# EAGLE board USB-C PURE v1 (EAGLE 9.7.0), part 1 of 2
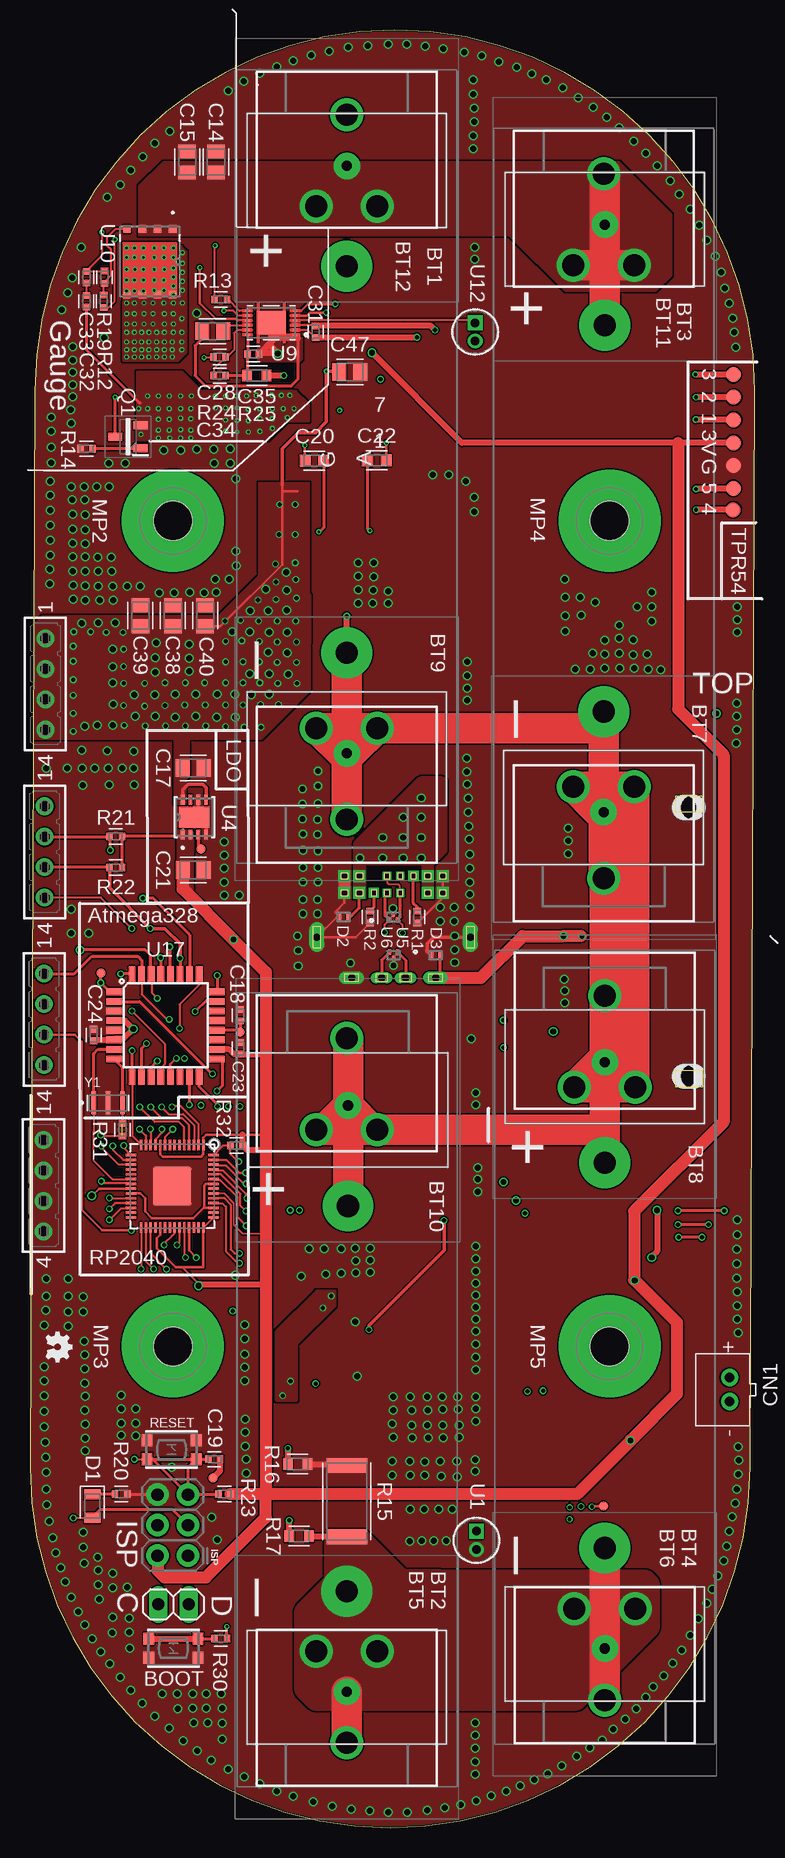
[diagram p0: board, top side]
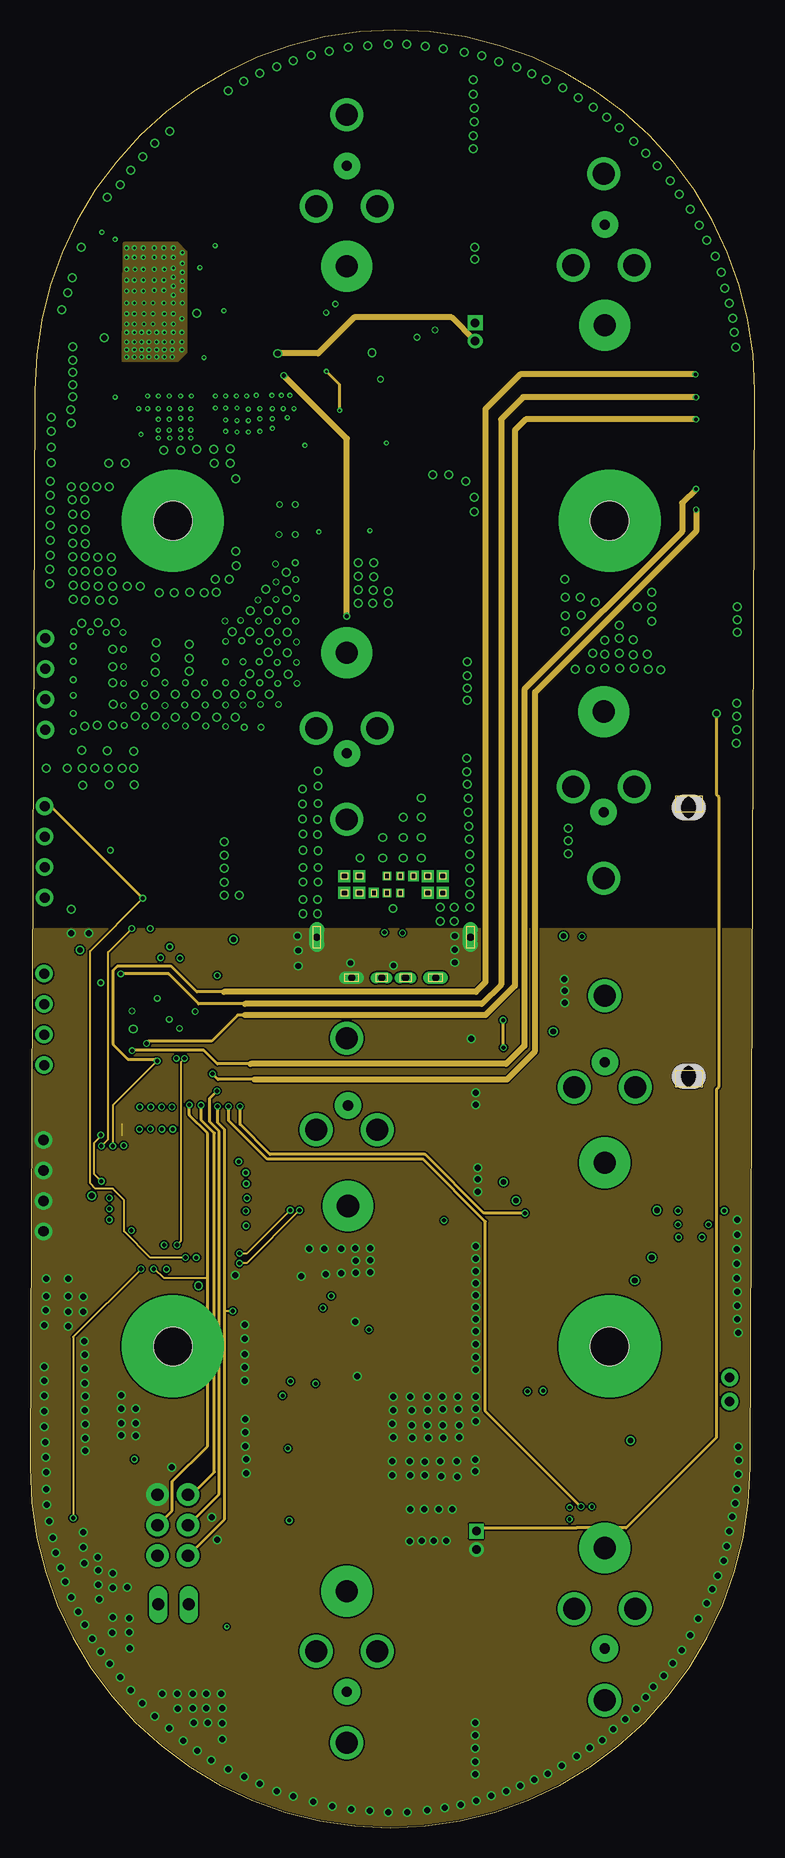
[diagram p1: board, inner layer Route2]
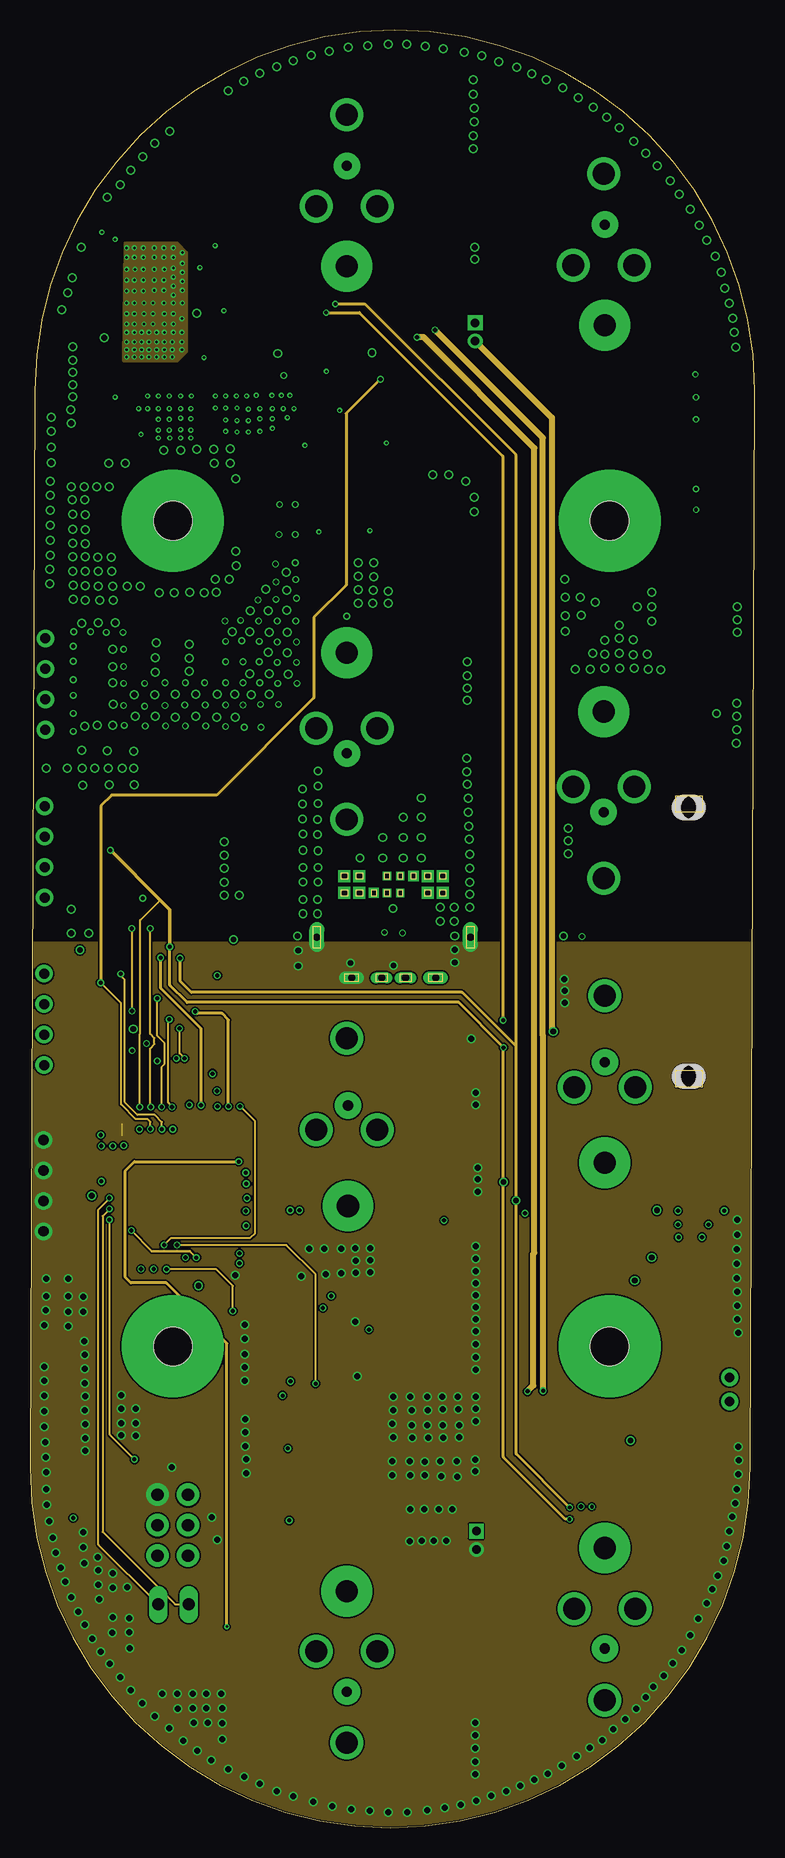
[diagram p2: board, inner layer Route15]
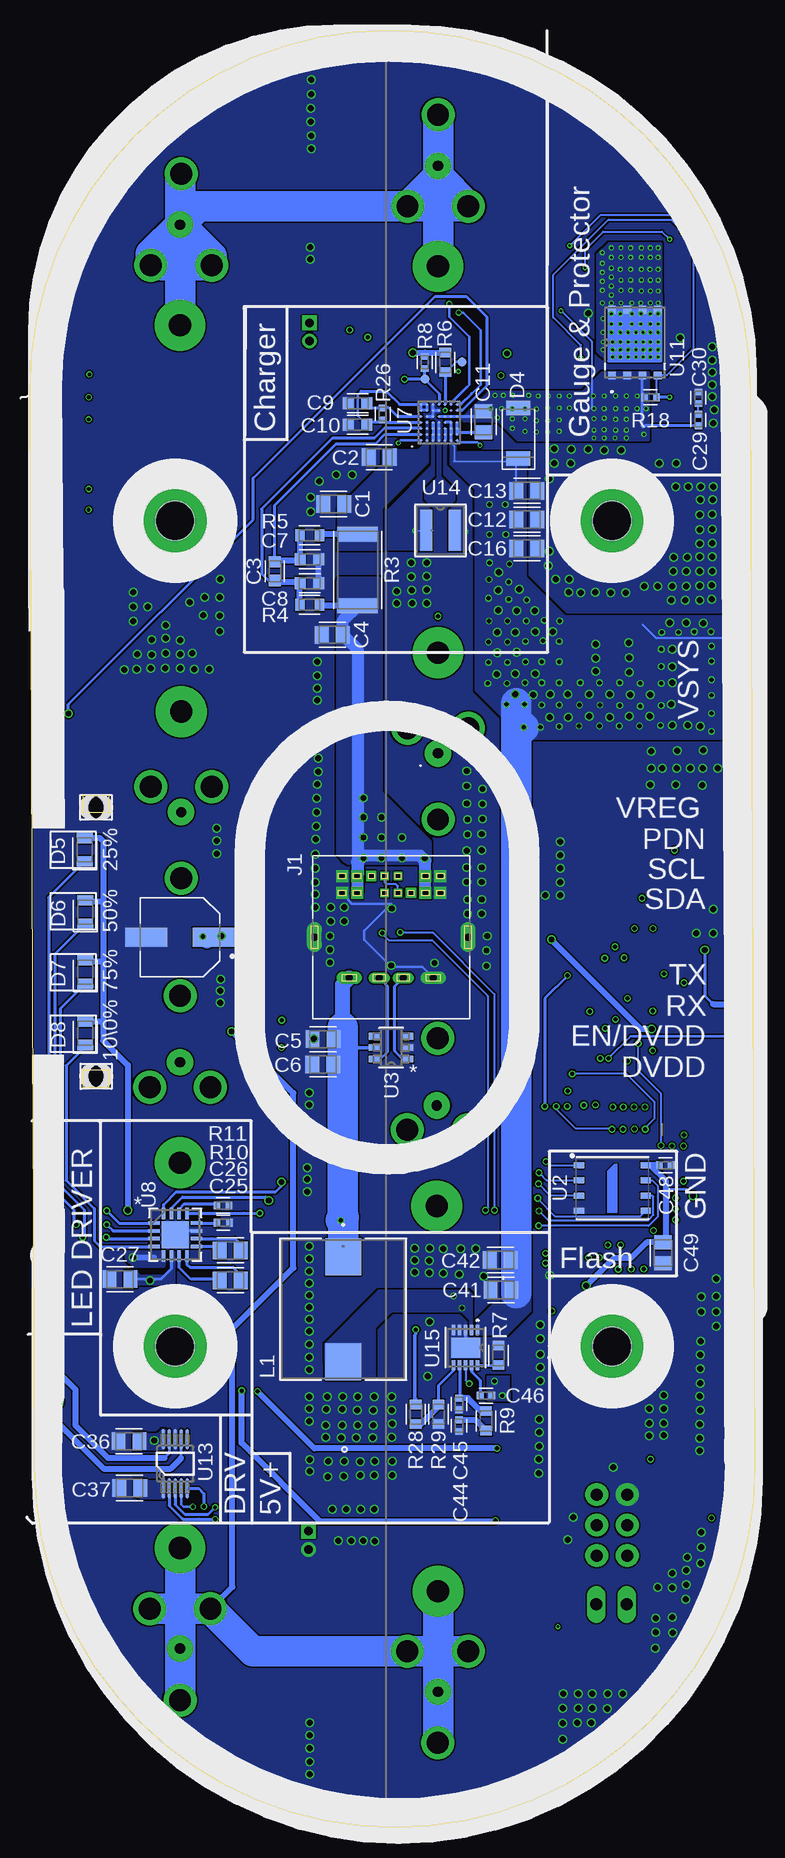
[diagram p3: board, bottom side, seen from below]

Size 60.4 x 149.8 mm. Coordinates in mm from the lower left corner, seen from the top.
Outline: 53.8,84.6 53.8,86 56,86 56,84.6 53.8,84.6
Outline: 53.8,61.7 53.8,63.1 56,63.1 56,61.7 53.8,61.7
Outline: 0.4,119.8 0,30 arc180 60,30 60.4,119.8 arc180 0.4,119.8
Copper layers (1*2*15*16): Top 0.035559375mm / dielectric 0.17018125mm / Route2 0.01778125mm / dielectric 47mil / Route15 0.01778125mm / dielectric 0.17018125mm / Bottom 0.035559375mm
Design rules "jlcpcb-4-layer": minimum track width 5mil, minimum drill 0.2mm, track to track 0.126490625mm, track to pad 0.126490625mm, pad to pad 0.126490625mm, via to via 0.126490625mm, smd to smd 0mil, copper to edge 0.1mm, drill to drill 5mil, minimum pad ring 4mil, minimum via ring 4mil, stop-mask expansion 3mil, vias tented up to drill 100mil, thermal gap 10mil
Net classes: 1 power: width 0.305 mm; 2 gnd: width 0.127 mm, drill 0.483 mm, clearance 0.127 mm; 3 usbvcc: width 0.127 mm, drill 0.483 mm, clearance 0.127 mm; 4 aref: width 0.127 mm, drill 0.483 mm, clearance 0.127 mm

## Footprints (pad centres in the part's own frame; a part is rotated, then mirrored left to right if it is on the bottom)
54 = drill 1.83 pad 2.75: 1 3.3,2.54; 2 3.3,-2.54; 3 -4.32,0; 4 46.77,-2.54; 5 46.77,2.54; 6 54.39,0
254TR = drill 1.85 pad 4.24: 1 0,0 | drill 0.85 pad 2.2: 2 8.38,0
CAPC2012X110 = smd 1.165 x 1.465: 1 -0.875,0; 2 0.875,0
CAPC1608X85 = smd 0.921 x 0.97: 1 -0.775,0; 2 0.775,0
CAPC1005X60 = smd 0.56 x 0.629: 1 -0.485,0; 2 0.485,0
CAP_16SVPG270M = smd 3.5 x 1.6: 1 -2.8,0; 2 2.8,0
JST-PH-2-THM = drill 0.8 pad 1.422: 1 1,0; 2 -1,0
LEDC2012X105N_RND-R = smd 0.862 x 1.362: A 0.975,0; C -0.975,0
DPY2_TEX = smd 0.3 x 0.55: 1 -0.35,0; 2 0.35,0
SODFL4725X110 = smd 1.19 x 2.015: 1 -2.11,0; 2 2.11,0
QFN56_7MM_REDUCEDEPAD = smd 0.875 x 0.2: 1 -3.45,2.6; 2 -3.45,2.2; 3 -3.45,1.8; 4 -3.45,1.4; 5 -3.45,1; 6 -3.45,0.6; 7 -3.45,0.2; 8 -3.45,-0.2; 9 -3.45,-0.6; 10 -3.45,-1; 11 -3.45,-1.4; 12 -3.45,-1.8; 13 -3.45,-2.2; 14 -3.45,-2.6; 29 3.45,-2.6; 30 3.45,-2.2; 31 3.45,-1.8; 32 3.45,-1.4; 33 3.45,-1; 34 3.45,-0.6; 35 3.45,-0.2; 36 3.45,0.2; 37 3.45,0.6; 38 3.45,1; 39 3.45,1.4; 40 3.45,1.8; 41 3.45,2.2; 42 3.45,2.6 | smd 0.2 x 0.875: 15 -2.6,-3.45; 16 -2.2,-3.45; 17 -1.8,-3.45; 18 -1.4,-3.45; 19 -1,-3.45; 20 -0.6,-3.45; 21 -0.2,-3.45; 22 0.2,-3.45; 23 0.6,-3.45; 24 1,-3.45; 25 1.4,-3.45; 26 1.8,-3.45; 27 2.2,-3.45; 28 2.6,-3.45; 43 2.6,3.45; 44 2.2,3.45; 45 1.8,3.45; 46 1.4,3.45; 47 1,3.45; 48 0.6,3.45; 49 0.2,3.45; 50 -0.2,3.45; 51 -0.6,3.45; 52 -1,3.45; 53 -1.4,3.45; 54 -1.8,3.45; 55 -2.2,3.45; 56 -2.6,3.45 | smd 3.2 x 3.2: P$1 0,0
2X3-NS = drill 1.016 pad 1.88: 1 -2.54,-1.27; 2 -2.54,1.27; 3 0,-1.27; 4 0,1.27; 5 2.54,-1.27; 6 2.54,1.27
ADAMTECH_USB-C31-A-D-VT-CS1 = drill 0.45 pad 0.85 square: CC1 -1.65,5.1; CC2 1.65,3.7 | drill 0.6 pad 0.8 long: D+ 1,-3.38; D- -1,-3.38 | drill 0.45 pad 0.7 square: D+_A -0.55,5.1; D+_B 0.55,3.7; D-_A 0.55,5.1; D-_B -0.55,3.7 | drill 0.6 pad 1.05 long: G 3.5,-3.38; V -3.5,-3.38 | drill 0.45 pad 1 square: G_A1 -4.1,5.1; G_A2 4.1,5.1; G_B1 4.1,3.7; G_B2 -4.1,3.7; V_A1 -2.85,5.1; V_A2 2.85,5.1; V_B1 2.85,3.7; V_B2 -2.85,3.7 | drill 0.6 pad 1.25 long: S1 -6.4,0; S2 6.4,0
SAMTEC-SLW-104-01-X-S = drill 0.86 pad 1.46: 1 -3.81,0; 2 -1.27,0; 3 1.27,0; 4 3.81,0
1X02 = drill 1.016 long: 1 -1.27,0; 2 1.27,0
IND_IHLP_4040_DZ_VIS = smd 3.073 x 3.023: 1 -4.369,0; 2 4.369,0
STANDOFF_HEX_MALE-FEMALE_550X1200_M3X0.5_MTGP850H320 = drill 3.2 pad 8.5: 1 0,0 | hole 3.2: 0,0
SOT96P240X120-3N = smd 1.2 x 0.65: 1 -1.05,0.96; 2 -1.05,-0.96; 3 1.05,0
RESC1005X40 = smd 0.535 x 0.644: 1 -0.507,0; 2 0.507,0
RESC6332X71 = smd 1.231 x 3.37: 1 -2.97,0; 2 2.97,0
RESC1608X60 = smd 0.799 x 0.974: 1 -0.815,0; 2 0.815,0
BTN_KMR2_4.6X2.8 = smd 0.9 x 1: A 2.05,0.8; A' -2.05,0.8; B 2.05,-0.8; B' -2.05,-0.8
PAD.03X.03 = smd 0.762 x 0.762: P$1 0,0
PAD.03X.05 = smd 1.27 x 1.27: P$1 0,0
AC_USS = drill 0.711 pad 1.219 square: 1 0,0 | drill 0.711 pad 1.219: 2 1.524,0
WSON-8-6X5-SKINNY_CENTERPAD = smd 0.85 x 0.5: 1 -2.775,1.905; 2 -2.775,0.635; 3 -2.775,-0.635; 4 -2.775,-1.905; 5 2.775,-1.905; 6 2.775,-0.635; 7 2.775,0.635; 8 2.775,1.905
DBV6_TEX = smd 0.978 x 0.559: 1 -1.365,0.95; 2 -1.365,0; 3 -1.365,-0.95; 4 1.365,-0.95; 5 1.365,0; 6 1.365,0.95
VSON_DRBRQ1_TEX = smd 0.813 x 0.305: 1 -1.448,0.975; 2 -1.448,0.325; 3 -1.448,-0.325; 4 -1.448,-0.975; 5 1.448,-0.975; 6 1.448,-0.325; 7 1.448,0.325; 8 1.448,0.975 | smd 1.753 x 2.489: 9 0,0
DMX3_TEX = smd 0.25 x 0.453: 1 0,0.252; 2 -0.34,-0.252; 3 0.34,-0.252
21-100355_MXM = smd 0.25 x 0.25: A1 -1.5,1.5; A2 -1,1.5; A3 -0.5,1.5; A4 0,1.5; A5 0.5,1.5; A6 1,1.5; A7 1.5,1.5; B1 -1.5,1; B2 -1,1; B3 -0.5,1; B4 0,1; B5 0.5,1; B6 1,1; B7 1.5,1; C1 -1.5,0.5; C2 -1,0.5; C3 -0.5,0.5; C4 0,0.5; C5 0.5,0.5; C6 1,0.5; C7 1.5,0.5; D1 -1.5,0; D2 -1,0; D3 -0.5,0; D4 0,0; D5 0.5,0; D6 1,0; D7 1.5,0; E1 -1.5,-0.5; E2 -1,-0.5; E3 -0.5,-0.5; E4 0,-0.5; E5 0.5,-0.5; E6 1,-0.5; E7 1.5,-0.5; F1 -1.5,-1; F2 -1,-1; F3 -0.5,-1; F4 0,-1; F5 0.5,-1; F6 1,-1; F7 1.5,-1; G1 -1.5,-1.5; G2 -1,-1.5; G3 -0.5,-1.5; G4 0,-1.5; G5 0.5,-1.5; G6 1,-1.5; G7 1.5,-1.5
QFN-16_UF_LIT-L = smd 0.953 x 0.299: 1 -1.777,0.975; 2 -1.777,0.325; 3 -1.777,-0.325; 4 -1.777,-0.975; 9 1.777,-0.975; 10 1.777,-0.325; 11 1.777,0.325; 12 1.777,0.975 | smd 0.299 x 0.953: 5 -0.975,-1.777; 6 -0.325,-1.777; 7 0.325,-1.777; 8 0.975,-1.777; 13 0.975,1.777; 14 0.325,1.777; 15 -0.325,1.777; 16 -0.975,1.777 | smd 2.25 x 2.25: 17 0,0
IC_BQ27441DRZR-G1A = smd 0.4 x 0.2: 1 -1.975,1; 2 -1.975,0.6; 3 -1.975,0.2; 4 -1.975,-0.2; 5 -1.975,-0.6; 6 -1.975,-1; 7 1.975,-1; 8 1.975,-0.6; 9 1.975,-0.2; 10 1.975,0.2; 11 1.975,0.6; 12 1.975,1 | smd 2.45 x 1.95: 13 0,0
DQJ8 = smd 0.63 x 0.65: 1 -2.735,1.905; 2 -2.735,0.635; 3 -2.735,-0.635; 4 -2.735,-1.905; 5 2.735,-1.905; 6 2.735,-0.635; 7 2.735,0.635; 8 2.735,1.905
DGS0010A = smd 1.7 x 0.3: 1 -2.05,1; 2 -2.05,0.5; 3 -2.05,0; 4 -2.05,-0.5; 5 -2.05,-1; 6 2.05,-1; 7 2.05,-0.5; 8 2.05,0; 9 2.05,0.5; 10 2.05,1
XAL4030-472MEC_COC = smd 0.991 x 3.404: 1 -1.18,0; 2 1.18,0
DRC10_1P65X2P40_TEX = smd 0.85 x 0.28: 1 -1.475,1; 2 -1.475,0.5; 3 -1.475,0; 4 -1.475,-0.5; 5 -1.475,-1; 6 1.475,-1; 7 1.475,-0.5; 8 1.475,0; 9 1.475,0.5; 10 1.475,1 | smd 1.65 x 2.4: 11 0,0
TQFP32-08 = smd 1.27 x 0.559: 1 -4.293,2.8; 2 -4.293,2; 3 -4.293,1.2; 4 -4.293,0.4; 5 -4.293,-0.4; 6 -4.293,-1.2; 7 -4.293,-2; 8 -4.293,-2.8; 17 4.293,-2.8; 18 4.293,-2; 19 4.293,-1.2; 20 4.293,-0.4; 21 4.293,0.4; 22 4.293,1.2; 23 4.293,2; 24 4.293,2.8 | smd 0.559 x 1.27: 9 -2.8,-4.293; 10 -2,-4.293; 11 -1.2,-4.293; 12 -0.4,-4.293; 13 0.4,-4.293; 14 1.2,-4.293; 15 2,-4.293; 16 2.8,-4.293; 25 2.8,4.293; 26 2,4.293; 27 1.2,4.293; 28 0.4,4.293; 29 -0.4,4.293; 30 -1.2,4.293; 31 -2,4.293; 32 -2.8,4.293
RLP4-200-500_V1 = hole 2: -11.4,0.35; -11.4,-0.38; 11,0.35; 11,-0.38; -11.4,-0.3; -11.4,-0.22; -11.4,-0.14; -11.4,-0.06; -11.4,0.02; -11.4,0.1; -11.4,0.18; -11.4,0.22; -11.4,0.3; 11,-0.34; 11,-0.26; 11,-0.18; 11,-0.06; 11,0.02; 11,0.14; 11,0.22; 11,0.06; 11,0.26; 11,0.3; 11,-0.1; 11,-0.02
OSC_CSTNE16M0V530000R0 = smd 0.4 x 1.9: 1 -1.2,0; 2 0,0; 3 1.2,0

## Placement (x,y rotation side)
BT1  54  [54]  26.4,138.4 270 top
BT2  54  [54]  26.41,61.46 270 top
BT3  54  [54]  47.8,133.5 270 top
BT4  54  [54]  47.9,65 270 top
BT5  254TR  [254TR]  26.4,19.7 270 top
BT6  254TR  [254TR]  47.9,23.3 270 top
BT7  254TR  [254TR]  47.8,93 270 top
BT8  254TR  [254TR]  47.9,55.4 90 top
BT9  254TR  [254TR]  26.4,97.9 270 top
BT10  254TR  [254TR]  26.5,51.8 90 top
BT11  254TR  [254TR]  47.9,125.2 90 top
BT12  254TR  [254TR]  26.4,130.1 90 top
C1  22uF  [CAPC2012X110]  35.1,110.3 180 bottom
C2  22uF  [CAPC2012X110]  31.3,114.2 180 bottom
C3  0.1uF  [CAPC1608X85]  40,104.7 90 bottom
C4  22uF  [CAPC2012X110]  35.2,99.4 180 bottom
C5  22uF  [CAPC2012X110]  35.98,65.7 180 bottom
C6  22uF  [CAPC2012X110]  36,63.6 180 bottom
C7  0.015uF  [CAPC1608X85]  37.1,105.7 0 bottom
C8  0.015uF  [CAPC1608X85]  37.1,103.7 0 bottom
C9  4.7uF  [CAPC1608X85]  33.1,118.7 180 bottom
C10  4.7uF  [CAPC1608X85]  33.1,116.9 180 bottom
C11  22uF  [CAPC2012X110]  22.6,117.15 270 bottom
C12  22uF  [CAPC2012X110]  19,109 0 bottom
C13  22uF  [CAPC2012X110]  19,111.4 0 bottom
C14  22uF  [CAPC2012X110]  15.5,138.8 90 top
C15  22uF  [CAPC2012X110]  13.1,138.8 90 top
C16  22uF  [CAPC2012X110]  19,106.6 0 bottom
C17  22uF  [CAPC2012X110]  13.6,88.3 0 top
C18  100nF  [CAPC1005X60]  17.5,67.7 270 top
C19  100nF  [CAPC1005X60]  15.35,30.7 180 top
C20  0.22uF  [CAPC1608X85]  23.7,113.9 0 top
C21  22uF  [CAPC2012X110]  13.6,79.8 0 top
C22  0.22uF  [CAPC1608X85]  28.9,113.95 0 top
C23  100nF  [CAPC1005X60]  17.5,64.95 90 top
C24  100nF  [CAPC1005X60]  5.3,66.05 90 top
C25  1uF  [CAPC2012X110]  43.7,45.6 0 bottom
C26  1uF  [CAPC2012X110]  43.7,48.1 0 bottom
C27  1uF  [CAPC2012X110]  52.9,45.7 0 bottom
C28  2.2uF  [CAPC2012X110]  15.22,124.7 0 top
C29  100nF  [CAPC1005X60]  4.7,117.3 270 bottom
C30  100nF  [CAPC1005X60]  4.7,119.15 270 bottom
C31  100nF  [CAPC1005X60]  23.8,124.65 90 top
C32  100nF  [CAPC1005X60]  4.7,127.2 90 top
C33  100nF  [CAPC1005X60]  4.7,129.2 90 top
C34  1uF  [CAPC1005X60]  15.8,121 180 top
C35  100nF  [CAPC1005X60]  18.6,122.8 180 top
C36  1uF  [CAPC2012X110]  52.15,32.2 180 bottom
C37  1uF  [CAPC2012X110]  52.1,28.3 180 bottom
C38  22uF  [CAPC2012X110]  11.9,101 90 top
C39  22uF  [CAPC2012X110]  9.2,101 90 top
C40  22uF  [CAPC2012X110]  14.6,101 90 top
C41  22uF  [CAPC2012X110]  21.15,44.8 180 bottom
C42  22uF  [CAPC2012X110]  21.2,47.3 180 bottom
C43  16SVPG270M  [CAP_16SVPG270M]  47.9,74.2 180 bottom
C44  12nF  [CAPC1005X60]  24.65,33.5 270 bottom
C45  120pF  [CAPC1005X60]  24.65,35.3 270 bottom
C46  100nF  [CAPC1005X60]  22.4,36 0 bottom
C47  22uF  [CAPC2012X110]  26.65,121.3 0 top
C48  100nF  [CAPC1005X60]  7.45,55.2 180 bottom
C49  1uF  [CAPC2012X110]  7.65,47.9 270 bottom
CN1  [JST-PH-2-THM]  58.3,36.51 90 top
D1  LED_RED  [LEDC2012X105N_RND-R]  5.2,26.8 270 top
D2  TPD1E10B06QDPYRQ1DPY2_TEX  [DPY2_TEX]  26.15,75.88 180 top
D3  TPD1E10B06QDPYRQ1DPY2_TEX  [DPY2_TEX]  33.8,72.7 180 top
D4  PMEG4050ETP,115  [SODFL4725X110]  19.7,116.2 90 bottom
D5  LED_RED  [LEDC2012X105N_RND-R]  55.83,81.5 90 bottom
D6  LED_RED  [LEDC2012X105N_RND-R]  55.8,76.3 90 bottom
D7  LED_RED  [LEDC2012X105N_RND-R]  55.8,71.3 90 bottom
D8  LED_RED  [LEDC2012X105N_RND-R]  55.8,66.2 90 bottom
IC1  RP2040_QFN56  [QFN56_7MM_REDUCEDEPAD]  11.85,53.45 270 top
ISP  AVR_SPI_PROG_3X2NS  [2X3-NS]  11.9,25.2 90 top
J1  USB-C31-A-D-VT-CS1  [ADAMTECH_USB-C31-A-D-VT-CS1]  30.3,74.2 0 bottom
J4  SAMTEC-SLW-104-01-X-SJ  [SAMTEC-SLW-104-01-X-S]  1.18,67.35 270 top
J5  SAMTEC-SLW-104-01-X-SJ  [SAMTEC-SLW-104-01-X-S]  1.23,81.3 270 top
J7  SAMTEC-SLW-104-01-X-SJ  [SAMTEC-SLW-104-01-X-S]  1.13,53.5 270 top
J8  SAMTEC-SLW-104-01-X-SJ  [SAMTEC-SLW-104-01-X-S]  1.28,95.3 270 top
JP1  PINHD-1X2  [1X02]  11.95,18.6 0 top
L1  15uH  [IND_IHLP_4040_DZ_VIS]  34.3,43.2 270 bottom
MP2  STANDOFF_M/F_M3_12MM  [STANDOFF_HEX_MALE-FEMALE_550X1200_M3X0.5_MTGP850H320]  11.9,108.9 0 top
MP3  STANDOFF_M/F_M3_12MM  [STANDOFF_HEX_MALE-FEMALE_550X1200_M3X0.5_MTGP850H320]  11.9,40.1 0 top
MP4  STANDOFF_M/F_M3_12MM  [STANDOFF_HEX_MALE-FEMALE_550X1200_M3X0.5_MTGP850H320]  48.3,108.9 0 top
MP5  STANDOFF_M/F_M3_12MM  [STANDOFF_HEX_MALE-FEMALE_550X1200_M3X0.5_MTGP850H320]  48.3,40.1 0 top
Q1  2N7002K-T1  [SOT96P240X120-3N]  8.15,115.9 180 top
R1  5.1K  [RESC1005X40]  32.28,75.88 90 top
R2  5.1K  [RESC1005X40]  28.33,75.88 90 top
R3  0.01  [RESC6332X71]  33.1,104.8 90 bottom
R4  10  [RESC1608X60]  37.1,101.9 0 bottom
R5  10  [RESC1608X60]  37.1,107.7 0 bottom
R6  200K  [RESC1608X60]  25.8,122.1 90 bottom
R7  143K  [RESC1608X60]  21.35,39.35 270 bottom
R8  4.7K  [RESC1005X40]  27.5,122.1 90 bottom
R9  3.65k  [RESC1608X60]  22.4,33.9 270 bottom
R10  12k  [RESC1005X40]  44.3,50.4 180 bottom
R11  10k  [RESC1005X40]  44.31,51.85 180 bottom
R12  5.1K  [RESC1005X40]  6.15,127.2 90 top
R13  5.1K  [RESC1005X40]  15.9,127.35 180 top
R14  10k  [RESC1005X40]  4.7,114.9 0 top
R15  0.001  [RESC6332X71]  26.4,27.2 270 top
R16  100  [RESC1608X60]  22.3,30.3 180 top
R17  100  [RESC1608X60]  22.42,24.3 180 top
R18  10M  [RESC1005X40]  8.7,119.2 180 bottom
R19  10M  [RESC1005X40]  6.2,129.2 90 top
R20  1k  [RESC1005X40]  7.6,27.8 0 top
R21  4.7K  [RESC1005X40]  7.15,80 180 top
R22  4.7K  [RESC1005X40]  7.15,82.6 180 top
R23  10k  [RESC1005X40]  16.2,27.8 0 top
R24  5  [RESC1005X40]  15.8,122.55 180 top
R25  100  [RESC1608X60]  18.9,121 180 top
R26  5  [RESC1005X40]  31,117.8 270 bottom
R28  100K  [RESC1608X60]  28.25,34.45 270 bottom
R29  100K  [RESC1608X60]  26.35,34.45 270 bottom
R30  1k  [RESC1005X40]  15.9,15.75 180 top
R31  1k  [RESC1005X40]  7.7,58.15 270 top
R32  10k  [RESC1005X40]  17.2,56.85 180 top
RESET  KMR2  [BTN_KMR2_4.6X2.8]  11.8,31.5 0 top
RESET1  KMR2  [BTN_KMR2_4.6X2.8]  11.95,14.95 180 top
TP1  TEST-POINT3  [PAD.03X.03]  17.5,66.3 0 top
TP2  TEST-POINT3  [PAD.03X.03]  47.8,26.8 0 top
TP3  TEST-POINT3  [PAD.03X.03]  27.5,120.7 180 bottom
TP4  TEST-POINT3X5  [PAD.03X.05]  58.61,121.07 0 top
TP5  TEST-POINT3X5  [PAD.03X.05]  58.64,119.21 0 top
TP6  TEST-POINT3X5  [PAD.03X.05]  58.64,117.31 0 top
TP7  TEST-POINT3X5  [PAD.03X.05]  58.63,115.4 0 top
TP8  TEST-POINT3X5  [PAD.03X.05]  58.62,113.5 0 top
TP9  TEST-POINT3X5  [PAD.03X.05]  58.61,111.6 0 top
TP10  TEST-POINT3X5  [PAD.03X.05]  58.6,109.81 0 top
TP11  TEST-POINT3  [PAD.03X.03]  15.25,29.15 0 top
TP12  TEST-POINT3  [PAD.03X.03]  14.25,81.55 0 top
TP13  TEST-POINT3  [PAD.03X.03]  24.4,122.15 0 bottom
TP14  TEST-POINT3  [PAD.03X.03]  5.9,71.2 0 top
U1  AC103E2FAC_USS  [AC_USS]  37.2,24.7 270 top
U2  W25QXX128MBIT  [WSON-8-6X5-SKINNY_CENTERPAD]  11.87,53.3 0 bottom
U3  TPS2514AQDBVTQ1DBV6_TEX  [DBV6_TEX]  30.3,65 180 bottom
U4  TLV76633  [VSON_DRBRQ1_TEX]  13.7,84.2 90 top
U5  ESD122DMXRDMX3_TEX  [DMX3_TEX]  30.28,75.88 0 top
U6  ESD122DMXRDMX3_TEX  [DMX3_TEX]  30.3,72.7 180 top
U7  MAX77962EWJ06+21-100355_MXM  [21-100355_MXM]  26.3,117.1 90 bottom
U8  IS31FL3195QFN-16_UF_LIT-L  [QFN-16_UF_LIT-L]  48.3,49.4 0 bottom
U9  BQ28Z610DRZR  [IC_BQ27441DRZR-G1A]  20.1,125.4 180 top
U10  CSD16412Q5ADQJ8  [DQJ8]  10,130.5 270 top
U11  CSD16412Q5ADQJ8  [DQJ8]  10,123.75 90 bottom
U12  AC103E2FAC_USS  [AC_USS]  37.1,125.4 270 top
U13  DRV2605LDGSRDGS0010A  [DGS0010A]  48.3,30.32 90 bottom
U14  XAL4030-472MECXAL4030-472MEC_COC  [XAL4030-472MEC_COC]  26.2,108.1 0 bottom
U15  TPS54335-1ADRCTDRC10_1P65X2P40_TEX  [DRC10_1P65X2P40_TEX]  24.1,40 270 bottom
U17  ATMEGA328P_TQFP  [TQFP32-08]  11.3,66.85 0 top
U$1  OSHW-LOGOMINI  [OSHW-LOGO-MINI]  2.3,40.05 270 top
U$3  RLP4-200-500  [RLP4-200-500_V1]  54.9,74 90 bottom
Y1  CSTNE16M0V530000R0  [OSC_CSTNE16M0V530000R0]  6.5,60.4 0 top

## Library data of the parts
BT1-BT4 = 54; DESCRIPTION: Cylindrical Battery Contacts, Clips, Holders & Springs 16-19mm PC BATTERY CLIP; HEIGHT: mm; MANUFACTURER_NAME: Keystone Electronics; MANUFACTURER_PART_NUMBER: 54; MOUSER_PART_NUMBER: 534-54; MOUSER_PRICE-STOCK: https://www.mouser.co.uk/ProductDetail/Keystone-Electronics/54?qs=73q%2FgRcW4F3NakoJDesViw%3D%3D
BT5-BT12 = 254TR; DESCRIPTION: Keystone Electronics BATTERY HOLDER ON TAPE AND REEL; HEIGHT: 16.97mm; MANUFACTURER_NAME: Keystone Electronics; MANUFACTURER_PART_NUMBER: 254TR; MOUSER_PART_NUMBER: 534-254TR; MOUSER_PRICE-STOCK: https://www.mouser.co.uk/ProductDetail/Keystone-Electronics/254TR?qs=u16ybLDytRapOGIb7D1Ytg%3D%3D
C1-C42 C44-C49 = Capacitor; CATEGORY: Capacitor
C43 = 16SVPG270M; MANUFACTURER: Panasonic; MAXIMUM_PACKAGE_HEIGHT: 9.9mm; PARTREV: 05-Mar-21; STANDARD: Manufacturer Recommendations
CN1 = adafruit
D1 D5-D8 = LED; CATEGORY: LED; COLOR: RED; DESCRIPTION: CHIP LED ROUND; SUB-CATEGORY: CHIP; TYPE: ROUND_TOP
D2 D3 = TPD1E10B06QDPYRQ1; COPYRIGHT: Copyright (C) 2022 Ultra Librarian. All rights reserved.; DIGI-KEY_PART_NUMBER_1: 296-45327-1-ND; DIGI-KEY_PART_NUMBER_2: 296-45327-2-ND; DIGI-KEY_PART_NUMBER_3: 296-45327-6-ND; DIGI-KEY_PART_NUMBER_4: 296-TPD1E10B06QDPYRQ1CT-ND; DIGI-KEY_PART_NUMBER_5: 296-TPD1E10B06QDPYRQ1DKR-ND; DIGI-KEY_PART_NUMBER_6: 296-TPD1E10B06QDPYRQ1TR-ND; MANUFACTURER_PART_NUMBER: TPD1E10B06QDPYRQ1; MFR_NAME: Texas Instruments
D4 = Diode; CATEGORY: Diode; SUB-CATEGORY: Rectifier
IC1 = adafruit_micro
ISP TP1-TP14 = SparkFun-Connectors
J1 = USB-C31-A-D-VT-CS1; DESCRIPTION: USB-A (USB TYPE-A) and USB-C (USB TYPE-C), Stacked USB 2.0, USB 3.2 Gen 2 (USB 3.1 Gen 2, Superspeed+ (USB 3.1)) Receptacle Connector 28 Position Through Hole; DIGI-KEY_PART_NUMBER: 2057-USB-C31-A-D-VT-CS1-ND; MF: Adam Tech; MP: USB-C31-A-D-VT-CS1; PACKAGE: None; PURCHASE-URL: https://pricing.snapeda.com/search/part/USB-C31-A-D-VT-CS1/?ref=eda
J4 J5 J7 J8 = SAMTEC-SLW-104-01-X-S
JP1 = Connector; CATEGORY: CONNECTOR; SUB-CATEGORY: PIN-HEADER
L1 = IHLP4040DZER150M11; COPYRIGHT: Copyright (C) 2022 Ultra Librarian. All rights reserved.; DIGI-KEY_PART_NUMBER_1: 541-1309-1-ND; DIGI-KEY_PART_NUMBER_2: 541-1309-2-ND; DIGI-KEY_PART_NUMBER_3: 541-1309-6-ND; MANUFACTURER_PART_NUMBER: IHLP4040DZER150M11; MFR_NAME: Vishay
MP2-MP5 = PCB-Fasteners_Hardware; CATEGORY: Standoff/Spacer; SUB-CATEGORY: Male-Female
Q1 = 2N7002-7-F; ARROW_PART_NUMBER: 2N7002-7-F; ARROW_PRICE-STOCK: https://www.arrow.com/en/products/2n7002-7-f/diodes-incorporated?region=nac; DESCRIPTION: MOSFET N-Channel 60V 0.21A SOT23 Diodes Inc 2N7002-7-F N-channel MOSFET Transistor, 0.115 A, 60 V, 3-Pin SOT-23; HEIGHT: 1.2mm; MANUFACTURER_NAME: Diodes Inc.; MANUFACTURER_PART_NUMBER: 2N7002-7-F; MOUSER_PART_NUMBER: 621-2N7002-F; MOUSER_PRICE-STOCK: https://www.mouser.co.uk/ProductDetail/Diodes-Incorporated/2N7002-7-F?qs=jMXWnm70%252BC%252BAX%252BMLzUkTZg%3D%3D
R1-R26 R28-R32 = Resistor; CATEGORY: Resistor; SUB-CATEGORY: Fixed
RESET RESET1 = microbuilder
U1 U12 = 103AT‐2; COPYRIGHT: Copyright (C) 2022 Ultra Librarian. All rights reserved.; DIGI-KEY_PART_NUMBER_1: 615-1105-ND; MANUFACTURER_PART_NUMBER: AC103E2F; MFR_NAME: US Sensor
U2 = SparkFun-IC-Memory; PROD_ID: IC-15107
U3 = TPS2514AQDBVTQ1; COPYRIGHT: Copyright (C) 2022 Ultra Librarian. All rights reserved.; DIGI-KEY_PART_NUMBER_1: 2156-TPS2514AQDBVTQ1-ND; DIGI-KEY_PART_NUMBER_2: 296-TPS2514AQDBVTQ1CT-ND; DIGI-KEY_PART_NUMBER_3: 296-TPS2514AQDBVTQ1DKR-ND; DIGI-KEY_PART_NUMBER_4: 296-TPS2514AQDBVTQ1TR-ND; DIGI-KEY_PART_NUMBER_5: TPS2514AQDBVTQ1-ND; MANUFACTURER_PART_NUMBER: TPS2514AQDBVTQ1; MFR_NAME: Texas Instruments
U4 = TLV76633; COPYRIGHT: Copyright (C) 2022 Ultra Librarian. All rights reserved.; MANUFACTURER_PART_NUMBER: TLV76650QWDRBRQ1; MFR_NAME: Texas Instruments
U5 U6 = ESD122DMXR; COPYRIGHT: Copyright (C) 2022 Ultra Librarian. All rights reserved.; DIGI-KEY_PART_NUMBER_1: 296-48543-1-ND; DIGI-KEY_PART_NUMBER_2: 296-48543-2-ND; DIGI-KEY_PART_NUMBER_3: 296-48543-6-ND; DIGI-KEY_PART_NUMBER_4: ESD122DMXR-ND; MANUFACTURER_PART_NUMBER: ESD122DMXR; MFR_NAME: Texas Instruments
U7 = MAX77962EWJ06; COPYRIGHT: Copyright (C) 2022 Ultra Librarian. All rights reserved.; MANUFACTURER_PART_NUMBER: MAX77962EWJ06+; MFR_NAME: Maxim Integrated Products
U8 = IS31FL3195; COPYRIGHT: Copyright (C) 2022 Ultra Librarian. All rights reserved.; DIGI-KEY_PART_NUMBER_1: LT3518IUF#PBF-CRL-ND; DIGI-KEY_PART_NUMBER_2: LT3518IUF#PBF-ND; MANUFACTURER_PART_NUMBER: LT3518IUF#PBF; MFR_NAME: Analog Devices / Linear Technology
U9 = BQ28Z610DRZR
U10 U11 = CSD16412Q5A; COPYRIGHT: Copyright (C) 2022 Ultra Librarian. All rights reserved.; DIGI-KEY_PART_NUMBER_1: 296-24256-1-ND; DIGI-KEY_PART_NUMBER_2: 296-24256-2-ND; DIGI-KEY_PART_NUMBER_3: 296-24256-6-ND; DIGI-KEY_PART_NUMBER_4: 2156-CSD16412Q5A-ND; MANUFACTURER_PART_NUMBER: CSD16412Q5A; MFR_NAME: Texas Instruments
U13 = DRV2605LDGSR‎; COPYRIGHT: Copyright (C) 2022 Ultra Librarian. All rights reserved.; DIGI-KEY_PART_NUMBER_1: 296-40032-1-ND; DIGI-KEY_PART_NUMBER_2: 296-40032-2-ND; DIGI-KEY_PART_NUMBER_3: 296-40032-6-ND; MANUFACTURER_PART_NUMBER: DRV2605LDGSR; MFR_NAME: Texas Instruments; REFDES: RefDes; TYPE: TYPE
U14 = XAL4030-332MEC; COPYRIGHT: Copyright (C) 2022 Ultra Librarian. All rights reserved.; MANUFACTURER_PART_NUMBER: XAL4030-472MEC; MFR_NAME: Coilcraft
U15 = TPS54335; COPYRIGHT: Copyright (C) 2022 Ultra Librarian. All rights reserved.; DIGI-KEY_PART_NUMBER_1: 296-43174-1-ND; DIGI-KEY_PART_NUMBER_2: 296-43174-2-ND; DIGI-KEY_PART_NUMBER_3: 296-43174-6-ND; MANUFACTURER_PART_NUMBER: TPS54335-1ADRCT; MFR_NAME: Texas Instruments
U17 = SparkFun-IC-Microcontroller; PROD_ID: IC-09069
U$1 = SparkFun-Aesthetics
U$3 = RLP4-200-500
Y1 = CSTNE16M0V530000R0; DESCRIPTION: 16 MHz Ceramic Resonator Built in Capacitor 15 pF ±0.3% 40 Ohms -40°C ~ 85°C Surface Mount; DIGI-KEY_PART_NUMBER: 490-17948-1-ND; MF: Murata Electronics; MP: CSTNE16M0V530000R0; PACKAGE: SMD-3 Murata; PURCHASE-URL: https://pricing.snapeda.com/search/part/CSTNE16M0V530000R0/?ref=eda

## Nets
1.2V: IC1.23 IC1.45 IC1.50
+3.3V [usbvcc]: C21.1 C23.1 C24.1 C27.2 C36.1 C48.2 C49.1 IC1.1 IC1.10 IC1.22 IC1.33 IC1.42 IC1.43 IC1.44 IC1.48 IC1.49 ISP.2 R6.2 R8.2 R21.1 R22.1 R23.2 R32.1 TP7.P$1 U2.8 U4.1 U4.2 U8.6 U13.10 U17.4 U17.6 U17.18
+5V [power]: C5.1 C6.1 C43.1 D3.1 J1.V L1.1 R28.1 U3.5
A2: IC1.40
A3: IC1.41
AREF [aref]: C18.2 TP1.P$1 U17.20
AVL: C9.1 R26.1 U7.A5
BAT+: BT1.1 BT1.2 BT1.3 BT3.1 BT3.2 BT3.3 BT11.1 BT11.2 BT12.1 BT12.2 C14.1 C15.1 U10.1 U10.2 U10.3
BATSN: C11.2 U7.G2 U7.G3 U7.G4
BOOT: R30.2 RESET1.B RESET1.B'
CC1: J1.CC1 R1.2
CC2: J1.CC2 R2.2
CHG: R12.2 R19.1 U10.4
CSINN: C3.2 C7.1 R5.1 U7.A2
CSINP: C3.1 C8.1 R4.1 U7.A3
D+: IC1.47 J1.D+_A J1.D+_B U5.2
D-: IC1.46 J1.D-_A J1.D-_B U5.3
DM: J1.D- U3.6 U6.2
DP: J1.D+ U3.1 U6.3
DSG: Q1.3 R13.2 R18.1 U11.4
DTR: C19.1 TP11.P$1
DVDD: J4.4
EN/DVDD: IC1.39 J4.3 U17.13
EN_5V: IC1.37 U15.8 U17.25
EN_HAP: IC1.9 U13.5 U17.23
EN_LED: IC1.36 U8.13 U17.24
GAUGE [gnd]: BT2.4 BT2.5 BT2.6 BT4.4 BT4.5 BT4.6 BT5.1 BT5.2 BT6.1 BT6.2 C28.1 C35.1 R15.2 R17.1 U9.1 U9.13 U12.2
GND [gnd]: C1.2 C2.2 C4.2 C5.2 C6.2 C7.2 C8.2 C9.2 C10.2 C12.2 C13.2 C14.2 C15.2 C16.2 C17.2 C18.1 C21.2 C23.2 C24.2 C27.1 C30.1 C36.2 C37.2 C38.2 C39.2 C40.2 C41.2 C42.2 C43.2 C44.2 C45.2 C47.2 C48.1 C49.2 D2.2 D3.2 IC1.P$1 ISP.6 J1.G J1.G_A1 J1.G_A2 J1.G_B1 J1.G_B2 J1.S1 J1.S2 J7.1 J7.2 J7.3 J7.4 R1.1 R2.1 R7.1 R10.1 R11.1 R14.1 R15.1 R16.1 R20.2 R29.2 RESET1.A RESET1.A' RESET.A RESET.A' TP8.P$1 U1.2 U2.4 U3.2 U4.4 U4.6 U4.9 U5.1 U6.1 U7.B5 U7.C5 U7.C6 U7.C7 U7.D1 U7.D2 U7.D3 U7.D4 U7.D6 U8.11 U8.17 U13.8 U15.3 U15.4 U15.5 U15.11 U17.3 U17.5 U17.21 Y1.2
INOKB: R6.1 TP13.P$1 U7.E7
INTB: IC1.12 R8.1 TP3.P$1 TP14.P$1 U7.D7 U17.1
IO2: IC1.11 TP5.P$1 U17.32
IO4: IC1.13 TP10.P$1 U17.2
IO5: IC1.14 TP9.P$1 U17.9
IO6: IC1.15 TP6.P$1 U17.10
IO7: IC1.16 TP4.P$1 U17.11
LX1: C22.1 U7.C1 U7.C2 U7.C3 U7.C4 U14.1
LX2: C20.2 U7.E1 U7.E2 U7.E3 U14.2
MID: BT1.4 BT1.5 BT1.6 BT2.1 BT2.2 BT2.3 BT3.4 BT3.5 BT3.6 BT4.1 BT4.2 BT4.3 BT7.1 BT7.2 BT8.1 BT8.2 BT9.1 BT9.2 BT10.1 BT10.2 R25.1
MISO: IC1.31 ISP.1 U17.16
MOSI: IC1.30 ISP.4 U17.15
N$1: C1.1 C2.1 R3.2 R5.2 U7.B1 U7.B2 U7.B3 U7.B4
N$2: C28.2 U9.10
N$3: R7.2 U15.10
N$4: U9.4 U12.1
N$5: C26.1 U8.9
N$6: R10.2 U8.12
N$7: C46.1 U15.9
N$8: C20.1 U7.G1
N$9: C22.2 U7.A1
N$10: U1.1 U7.G6
N$11: D5.C U8.1
N$12: D6.C U8.2
N$13: D7.C U8.3
N$14: D8.C U8.4
N$15: D5.A D6.A D7.A D8.A U8.5
N$16: R11.2 U8.14
N$17: C25.1 U8.7
N$18: C25.2 U8.8
N$19: R12.1 U9.9
N$20: R13.1 U9.7
N$21: C29.1 C30.2
N$22: D1.C R20.1
N$23: Q1.1 R14.2
N$24: TP2.P$1 U13.4
N$25: C26.2 U8.10
N$26: C32.2 C33.1
N$27: U10.5 U10.6 U10.7 U10.8 U11.5 U11.6 U11.7 U11.8
N$28: C33.2 R19.2 R24.2
N$29: CN1.2 U13.7
N$30: CN1.1 U13.9
N$31: C37.1 U13.1
N$32: C44.1 R9.2
N$33: C45.1 R9.1 U15.7
N$34: TP12.P$1 U4.3
N$35: R28.2 R29.1 U15.6
N$39 [gnd]: IC1.19
NEO_PWR: IC1.28
NEOPIX: IC1.27
PACK+: C11.1 C29.2 C32.1 D4.2 Q1.2 R18.2 U7.D5 U7.E5 U7.F5 U7.G5 U9.8 U11.1 U11.2 U11.3
PDN: IC1.38 J5.1 U17.26
PH: C46.2 L1.2 U15.2
PVL: C10.1 R26.2 U7.A4 U7.A6 U7.A7 U7.B6 U7.B7
QSPI_CS: IC1.56 R30.1 R32.2 U2.1
QSPI_DATA[0]: IC1.53 U2.5
QSPI_DATA[1]: IC1.55 U2.2
QSPI_DATA[2]: IC1.54 U2.3
QSPI_DATA[3]: IC1.51 U2.7
QSPI_SCK: IC1.52 U2.6
RESET: C19.2 IC1.26 ISP.5 R23.1 RESET.B RESET.B' U17.29
RXD: IC1.3 J4.2 U17.30
SCK: D1.A IC1.29 ISP.3 U17.17
SCL: IC1.5 J5.2 R22.2 U7.G7 U8.16 U9.5 U13.2 U17.28
SDA: IC1.4 J5.3 R21.2 U7.F7 U8.15 U9.6 U13.3 U17.27
SRN: C31.1 R16.2 U9.2
SRP: C31.2 R17.2 U9.3
SS: U17.14
SWCLK: IC1.24 JP1.1
SWDIO: IC1.25 JP1.2
TXD: IC1.2 J4.1 U17.31
VC1: C34.1 C35.2 R25.2 U9.12
VC2: C34.2 R24.1 U9.11
VDD_NC: U13.6
VIN [power]: C4.1 D2.1 J1.V_A1 J1.V_A2 J1.V_B1 J1.V_B2 R3.1 R4.2
VREG_IN: IC1.17 J5.4 U17.12
VSYS [power]: C12.1 C13.1 C16.1 C17.1 C38.1 C39.1 C40.1 C41.1 C42.1 C47.1 D4.1 J8.1 J8.2 J8.3 J8.4 U4.5 U4.8 U7.E4 U7.E6 U7.F1 U7.F2 U7.F3 U7.F4 U15.1
XTAL1: IC1.21 R31.1 R31.2 U17.8 Y1.3
XTAL2: IC1.20 U17.7 Y1.1